# Altium PCB mainboard.PcbDoc
Units mil, origin at the board's own origin, x right, y up, seen from the top; angles counter-clockwise.
Board outline 4859.69 x 2585.03 mil, 2 copper layers (Top Layer, Bottom Layer); 46 components, 46 nets, 202 pads, 50 vias.
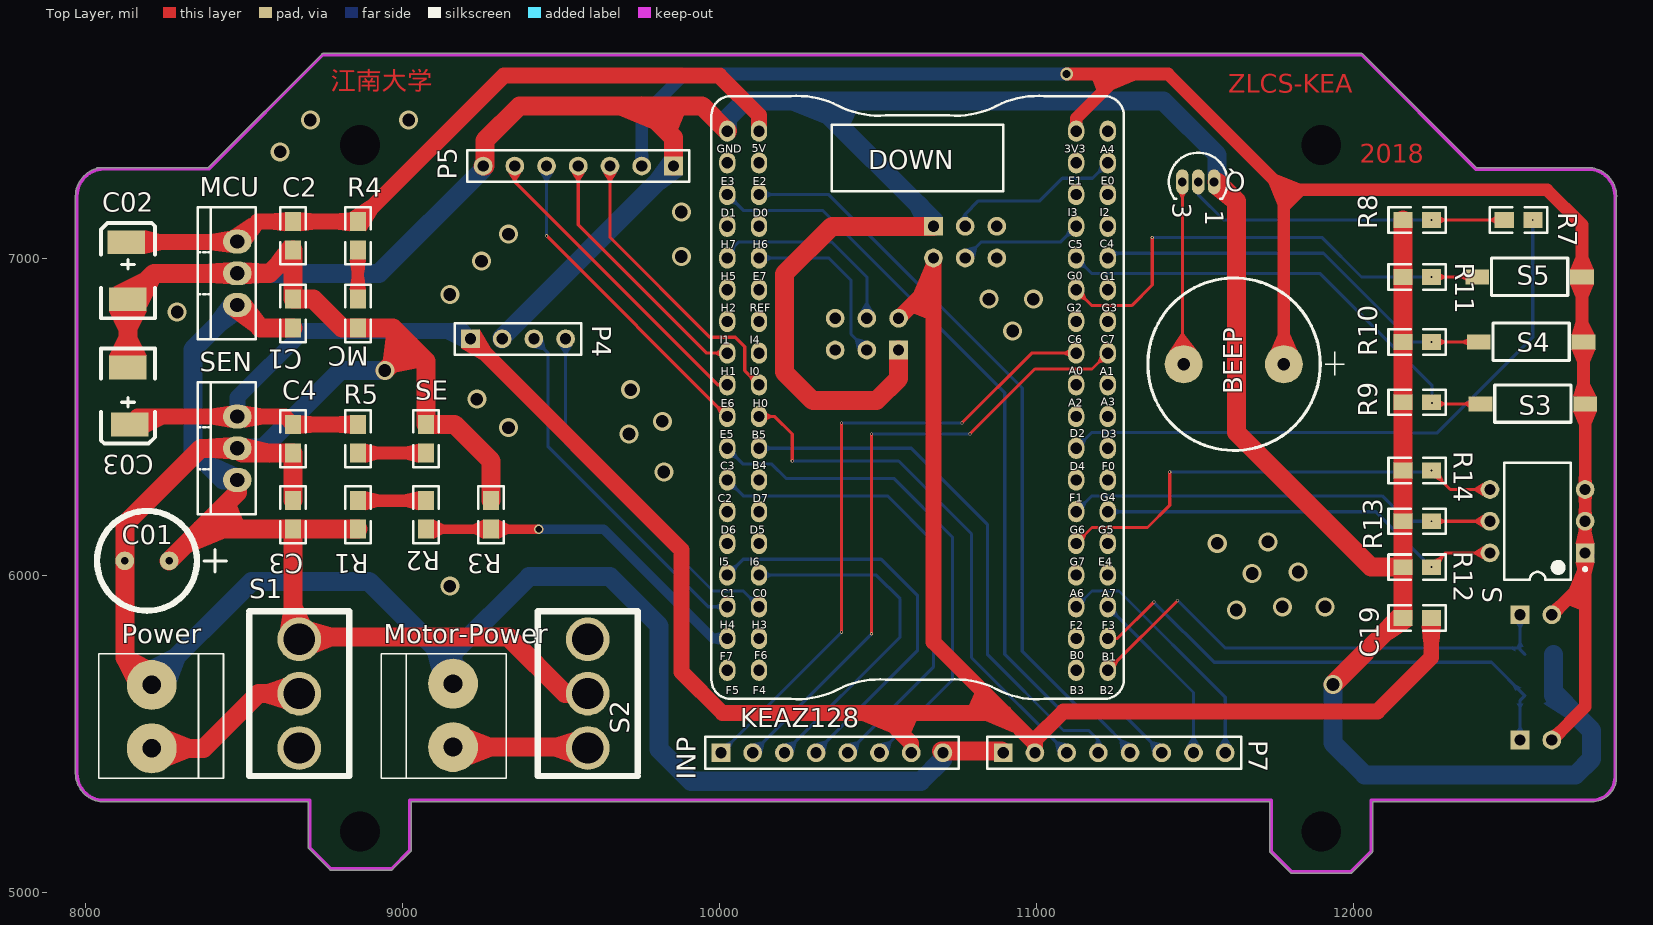
[diagram p0: Top Layer view]
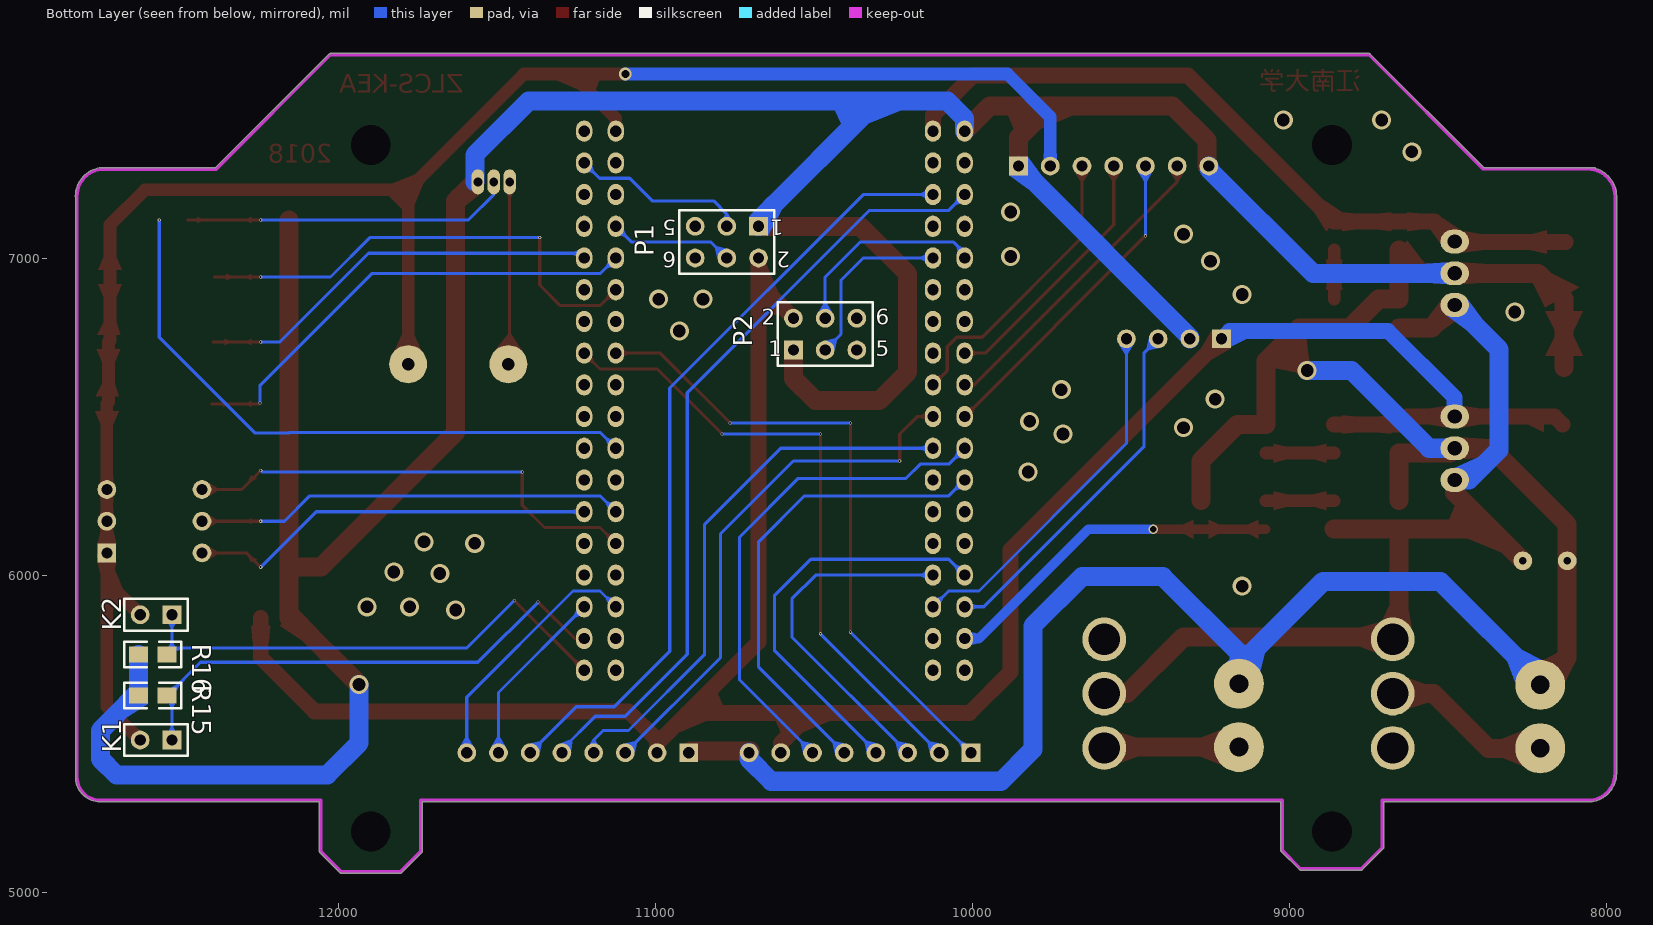
[diagram p1: Bottom Layer view, seen from below]

## Layer stack, top to bottom
Top Solder: solder mask 0.4, Solder Resist, Dk 3.5
Top Layer: signal copper 1.4
Dielectric 1: dielectric 12.6, FR-4, Dk 4.8
Bottom Layer: signal copper 1.4
Bottom Solder: solder mask 0.4, Solder Resist, Dk 3.5

## Board outline
8705.01,5137.46 cw(c8708.54,5141.02) 8703.53,5141.02 8703.53,5284.84 8050,5284.84 cw(c8050,5289.85) 8047.21,5285.69 cw(c8059.57,5375) 7969.4,5375 7969.4,7195 cw(c8059.57,7195) 8035.28,7281.83 cw(c8040,7280.15) 8040,7285.16 8388.07,7285.16 8746.45,7643.55 8746.44,7643.53 cw(c8750,7640) 8750,7645.02 12025,7645.02 cw(c12025,7640) 12028.56,7643.53 12028.55,7643.55 12387.08,7285.02 12737.73,7285.02 cw(c12738.94,7280.15) 12738.94,7285.16 cw(c12738.94,7195) 12744.08,7285.02 12750,7285.02 cw(c12750,7280) 12752.93,7284.07 cw(c12738.94,7195) 12829.1,7195 cw(c12824.08,7195) 12828.95,7193.8 12828.95,5358.4 cw(c12823.94,5358.4) 12828.67,5356.74 cw(c12750.53,5363.4) 12751.76,5284.99 cw(c12750.53,5289.85) 12750.53,5284.84 12060.01,5284.84 12060.01,5129 cw(c12055,5129) 12058.53,5125.43 12058.55,5125.45 11994.55,5061.45 11994.57,5061.47 cw(c11991,5065) 11991,5059.98 11804.57,5059.98 cw(c11804.57,5065) 11801,5061.47 11801.02,5061.45 11736.49,5125.98 11736.51,5125.97 cw(c11740.04,5129.53) 11735.02,5129.53 11735.02,5284.98 9028.52,5284.98 9028.52,5132.5 cw(c9023.5,5132.5) 9027.03,5128.94 9027.05,5128.95 8969.55,5071.45 8969.57,5071.47 cw(c8966,5075) 8966,5069.98 8774.57,5069.98 cw(c8774.57,5075) 8771,5071.47 8771.02,5071.45

## Design rules (kind name [scope] priority, off if disabled: settings)
Clearance [All] p1: gap=10 ignorepadtopadclearanceinfootprint=FALSE except(0: Arc-Hole Track-Hole SMDPad-Hole THPad-Hole Via-Hole Fill-Hole Poly-Hole Region-Hole Text-Hole)
PolygonConnect PolygonConnect_1 [All] p1: connectstyle=Direct reliefconductorwidth=10 reliefentries=4 polygonreliefangle="90 Angle" airgapwidth=10
PolygonConnect [IsVia] p2: connectstyle=Relief reliefconductorwidth=10 reliefentries=4 polygonreliefangle="90 Angle" airgapwidth=10
RoutingVias [All] p1: holewidth=28 width=50 viastyle="Through Hole" minholewidth=28 minwidth=50 maxholewidth=28 maxwidth=50
SolderMaskExpansion [All] p1: expansion=4
Width Width_15 [InNet('NetR1_1')] p1: maxlimit=100 minlimit=10 preferedwidth=40
Width Width_14 [InNet('NetR5_1')] p2: maxlimit=100 minlimit=10 preferedwidth=40
Width Width_13 [InNet('NetQ_2')] p3: maxlimit=100 minlimit=10 preferedwidth=10
Width Width_12 [InNet('NetMC_1')] p4: maxlimit=100 minlimit=10 preferedwidth=40
Width Width_11 [InNet('NetM_55')] p5: maxlimit=100 minlimit=10 preferedwidth=10
Width Width_10 [InNet('NetM_54')] p6: maxlimit=100 minlimit=10 preferedwidth=10
Width Width_9 [InNet('NetD_1')] p7: maxlimit=100 minlimit=10 preferedwidth=40
Width Width_8 [InNet('NetMotor-Power_1')] p8: maxlimit=100 minlimit=10 preferedwidth=60
Width Width_7 [InNet('NetPower_2')] p9: maxlimit=100 minlimit=10 preferedwidth=60
Width Width_6 [InNet('ADC_BAT')] p10: maxlimit=100 minlimit=10 preferedwidth=30
Width Width_5 [InNet('GND')] p11: maxlimit=100 minlimit=10 preferedwidth=60
Width Width_4 [InNet('VCC-3.3V')] p12: maxlimit=100 minlimit=10 preferedwidth=40
Width Width_3 [InNet('5V-MCU')] p13: maxlimit=100 minlimit=10 preferedwidth=50
Width Width_2 [InNet('5V-SEN')] p14: maxlimit=50 minlimit=10 preferedwidth=50
Width Width_1 [InNet('VCC-7.2V')] p15: maxlimit=100 minlimit=10 preferedwidth=60
Width [All] p16: maxlimit=10 minlimit=10 preferedwidth=10
30 further rules are at their usual default settings.

## Classes and differential pairs
component class 主板2: BEEP C01 C1 C2 C02 C03 C3 C4 C19 INP K1 K2 MC MCU Motor-Power P2 P4 P5 Power R1 R2 R3 R4 R5 R7 R8 R9 R10 R11 R12 R13 R14 R15 R16 S S1 S2 S3 S4 S5 SE SEN

## Components (designator, comment, footprint, x,y, rotation, side; value= is the part's Value field where it differs from the comment)
BEEP "" PCBComponent_1 10734,4185 r270 top
C01 "Cap Pol1" "470uf 16V" 8195,6045 r0 top value=1000uF
C1 "Cap" 0805 8655,6870 r270 top value=0.47uF
C2 "Cap" 0805 8655,7025 r90 top value=0.1uF
C02 "Cap Pol1" 7343 8135,6960 r90 top value=22uF
C3 "Cap" 0805 8655,6235 r270 top value=0.47uF
C03 "Cap Pol2" 7343 8135,6565 r270 top value=22uf
C4 "Cap" 0805 8655,6385 r90 top value=0.1uF
C19 "Cap" 0805 12245,5865 r180 top value=0.1uF
INP "" HDR1X8 10005,5440 r0 top
K1 "KEA 1" HDR1X2 12525,5480 r0 bottom
K2 "KEA 2" HDR1X2 12525,5875 r0 bottom
KEAZ128 "S9KEAZ128AMLK" KEA128_CORE 9970,5605 r0 top
MC "LED1" 0805 8860,6870 r270 top
MCU "LM2940S-5.0" TO-220 8480,6951.73 r90 top
Motor-Power "电机接口" P_Header 9160,5557.66 r90 top
P1 "Header 2X3" HDR2X3 10675,7100 r0 bottom
P2 "Header 2X3" HDR2X3 10565,6710 r180 bottom
P4 "MPU_6050" HDR1X4 9215,6745 r0 top
P5 "OLED" HDR1X7 9855,7290 r180 top
P7 "Header 8" HDR1X8 10895,5440 r0 top
Power "电池接口" P_Header 8210,5553.88 r270 top
Q "S8050" TO-92 11510,7240 r270 top
R1 "Res2" 0805 8860,6235 r270 top value=10K
R2 "Res2" 0805 9075,6145 r90 top value=10K
R3 "Res2" 0805 9280,6235 r270 top value=10K
R4 "" 0805 8860,7025 r90 top value=1K
R5 "" 0805 8860,6385 r90 top value=1K
R7 "Res2" 0805 12475,7120 r0 top value=1K
R8 "Res2" 0805 12155,7120 r0 top value=10K
R9 "Res2" 0805 12155,6545 r0 top value=1K
R10 "Res2" 0805 12155,6735 r0 top value=1K
R11 "Res2" 0805 12155,6940 r0 top value=1K
R12 "Res2" 0805 12155,6025 r0 top
R13 "Res2" 0805 12155,6170 r0 top
R14 "Res2" 0805 12155,6330 r0 top
R15 "Res2" 0805 12629.94,5620 r180 bottom value=1K
R16 "Res2" 0805 12629.94,5750 r180 bottom value=1K
S "SW DIP-3" DIP-6 12580,6170 r180 top
S1 "SW-SPDT" Key_SWITCH 8675,5625 r90 top
S2 "SW-SPDT" Key_SWITCH 9585,5627.52 r270 top
S3 "SW-PB" 轻触开关 12520,6560 r90 top
S4 "SW-PB" 轻触开关 12515,6755 r90 top
S5 "SW-PB" 轻触开关 12510,6960 r90 top
SE "LED2" 0805 9075,6385 r90 top
SEN "LM2940S-5.0" TO-220 8480,6400 r90 top

## Footprints (in the part's own frame and the unit in brackets; to place one, negate y for a bottom-side part, rotate by r counter-clockwise, add the part's x,y. Pads: shape width x height; smd on the part's side, far side on the other; paste and mask are expansions set on the pad)
"470uf 16V" [mm]
  round 1.5 hole 0.6: 1(1.778,0) 2(-1.778,0)
  silkscreen extent -4,-4 6.35,4
0805 [mil]
  rect 60x50 smd: 1(0,0) 2(90,0)
  silkscreen extent -45,-40 135,40
7343 [mil]
  rect 75x118.11 smd: 1(90,5) 2(-90,0)
  silkscreen extent -150,-85 150,85
DIP-6 [mm] "DIP; 6 Leads; Row Spacing 7.62 mm; Pitch 2.54 mm"
  rect 1.5x1.5 hole 0.9: 1(-3.81,2.54)
  round 1.5 hole 0.9: 2(-3.81,0) 3(-3.81,-2.54) 4(3.81,-2.54) 5(3.81,0) 6(3.81,2.54)
  silkscreen extent -3.94,-4.7 2.65,4.7, body extent -3.55,-4.7 3.55,4.7, height 5.46
HDR1X2 [mm] "Connector; Header; 2 Position"
  rect 1.5x1.5 hole 0.9: 1(0,0)
  round 1.5 hole 0.9: 2(2.54,0)
  silkscreen extent -1.27,-1.27 3.81,1.27
HDR1X4 [mm] "Connector; Header; 4 Position"
  rect 1.5x1.5 hole 0.9: 1(0,0)
  round 1.5 hole 0.9: 2(2.54,0) 3(5.08,0) 4(7.62,0)
  silkscreen extent -1.27,-1.27 8.89,1.27
HDR1X7 [mm] "Connector; Header; 7 Position"
  rect 1.5x1.5 hole 0.9: 1(0,0)
  round 1.5 hole 0.9: 2(2.54,0) 3(5.08,0) 4(7.62,0) 5(10.16,0) 6(12.7,0) 7(15.24,0)
  silkscreen extent -1.27,-1.27 16.51,1.27
HDR1X8 [mm] "Connector; Header; 8 Position"
  rect 1.5x1.5 hole 0.9: 1(0,0)
  round 1.5 hole 0.9: 2(2.54,0) 3(5.08,0) 4(7.62,0) 5(10.16,0) 6(12.7,0) 7(15.24,0) 8(17.78,0)
  silkscreen extent -1.27,-1.27 19.05,1.27
HDR2X3 [mm] "Connector; Header; 3x2 Position"
  rect 1.5x1.5 hole 0.9: 1(0,0)
  round 1.5 hole 0.9: 2(0,2.54) 3(2.54,0) 4(2.54,2.54) 5(5.08,0) 6(5.08,2.54)
  silkscreen extent -1.27,-1.27 6.35,3.81
KEA128_CORE [mm]
  oval 1.3x1.7 hole 0.9: 1(3.937,45.593) 2(1.397,45.593) 3(3.937,43.053) 4(1.397,43.053) 5(3.937,40.513) 6(1.397,40.513) 7(3.937,37.973) 8(1.397,37.973) 9(3.937,35.433) 10(1.397,35.433) 11(3.937,32.893) 12(1.397,32.893) 13(3.937,30.353) 14(1.397,30.353) 15(3.937,27.813) 16(1.397,27.813) 17(3.937,25.273) 18(1.396,25.277) 19(3.937,22.733) 20(1.397,22.733) 21(3.937,20.193) 22(1.397,20.193) 23(3.937,17.653) 24(1.397,17.653) 25(3.937,15.113) 26(1.397,15.113) 27(3.937,12.573) 28(1.397,12.573) 29(3.937,10.033) 30(1.397,10.033) 31(3.937,7.493) 32(1.397,7.493) 33(3.937,4.953) 34(1.397,4.953) 35(3.937,2.413) 36(1.397,2.413) 37(31.877,45.593) 38(29.337,45.593) 39(31.877,43.053) 40(29.337,43.053) 41(31.877,40.513) 42(29.337,40.513) 43(31.877,37.973) 44(29.337,37.973) 45(31.877,35.433) 46(29.337,35.433) 47(31.877,32.893) 48(29.337,32.893) 49(31.877,30.353) 50(29.337,30.353) 51(31.877,27.813) 52(29.337,27.813) 53(31.877,25.273) 54(29.337,25.273) 55(31.877,22.733) 56(29.337,22.733) 57(31.877,20.193) 58(29.337,20.193) 59(31.877,17.653) 60(29.337,17.653) 61(31.877,15.113) 62(29.337,15.113) 63(31.877,12.573) 64(29.337,12.573) 65(31.877,10.033) 66(29.337,10.033) 67(31.877,7.493) 68(29.337,7.493) 69(31.877,4.953) 70(29.337,4.953) 71(31.877,2.413) 72(29.337,2.413)
  silkscreen extent 0.13,0.1 33.15,48.41
Key_SWITCH [mm]
  round 3.5 hole 2.5: 1(-4.318,0) 2(0.032,0) 3(4.382,0)
  silkscreen extent -6.57,-4 6.63,4
P_Header [mm]
  round 4 hole 1.5: 1(-2.54,0) 2(2.54,0)
  silkscreen extent -5.05,-4.25 4.95,5.75
PCBComponent_1 [mil]
  round 120 hole 40: 1(-2480,1046) 2(-2480,730)
  silkscreen extent -2752,617 -2208,1236
TO-92 [mm] "TO, Flat Index; 3 In-Line, Axial Leads; Body Dia. 4.6mm; Leads 0.41 x 0.39 mm (max)"
  oval 2x1 hole 0.7: 1(0,1.27) 2(0,0) 3(0,-1.27)
  silkscreen extent -2.34,-2.34 1.35,2.34
TO-220 [mil]
  oval 75x90 hole 45: 1(-100,0) 2(0,0) 3(100,0)
  silkscreen extent -208,-58 208,125
轻触开关 [mil]
  rect 47.24x74.8 smd: 1(-20,-210) 2(-20,120)
  silkscreen extent -78,-165 40,75

## Part data
BEEP: library part BEEP
C01 C02: "Polarized Capacitor (Radial)", LatestRevisionDate=17-Jul-2002, LatestRevisionNote="Re-released for DXP Platform.", PackageDescription="Polarized Capacitor (Radial); 2 Leads", PackageReference=RB7.6-15, Published=8-Jun-2000, Publisher="Altium Limited"
C1 C2 C3 C4 C19: "Capacitor", LatestRevisionDate=17-Jul-2002, LatestRevisionNote="Re-released for DXP Platform.", PackageDescription="Radial Cap, Thru-Hole; 2 Leads; 0.3 in Pin Spacing", PackageReference=RAD-0.3, Published=8-Jun-2000, Publisher="Altium Limited"
C03: "Polarized Capacitor (Axial)", LatestRevisionDate=17-Jul-2002, LatestRevisionNote="Re-released for DXP Platform.", PackageReference=POLAR0.8, Published=8-Jun-2000, Publisher="Altium Limited"
INP: library part "Header 8", "接插件", LatestRevisionDate=17-Jul-2002, LatestRevisionNote="Re-released for DXP Platform.", Publisher="Altium Limited"
K2: library part "KEA 1"
KEAZ128: library part KEA128-Core
MC SE: library part LED0, "Typical INFRARED GaAs LED", LatestRevisionDate=08-Jul-2005, LatestRevisionNote="Mech Layer 1 removed.", PackageDescription="LED; 2 Leads", PackageReference=LED-0, Published=8-Jun-2000, Publisher="Altium Limited"
MCU SEN: library part LM2940
Motor-Power Power: library part "Header 2", "Header, 2-Pin", LatestRevisionDate=17-Jul-2002, LatestRevisionNote="Re-released for DXP Platform.", Publisher="Altium Limited"
P1 P2: library part 编码器
P4: library part "Header 4", "Header, 4-Pin", LatestRevisionDate=17-Jul-2002, LatestRevisionNote="Re-released for DXP Platform.", Publisher="Altium Limited"
P5: library part "Header 7", "Header, 7-Pin", LatestRevisionDate=17-Jul-2002, LatestRevisionNote="Re-released for DXP Platform.", Publisher="Altium Limited"
P7: "Header, 8-Pin", LatestRevisionDate=17-Jul-2002, LatestRevisionNote="Re-released for DXP Platform.", Publisher="Altium Limited"
Q: library part NPN, "8050/BCW846/BCW847"
R1 R2 R3 R7 R8 R9 R10 R11 R12 R13 R14 R15 R16: "Resistor", LatestRevisionDate=17-Jul-2002, LatestRevisionNote="Re-released for DXP Platform.", PackageReference=AXIAL-0.4, Published=8-Jun-2000
  R1 R2 R3 R7 R8 R9 R10 R11 R15 R16: Publisher="Altium Limited"
  R12 R13 R14: Publisher=1K
R4 R5: library part Res2, "Resistor", LatestRevisionDate=17-Jul-2002, LatestRevisionNote="Re-released for DXP Platform.", PackageDescription="Axial Device, Thru-Hole; 2 Leads; 0.4 in Pin Spacing", PackageReference=AXIAL-0.4, Published=8-Jun-2000, Publisher="Altium Limited"
S: "DIP Switch, 3 Position, SPST", Code_JEDEC=MO-001-AM, LatestRevisionDate=17-Jul-2002, LatestRevisionNote="Re-released for DXP Platform.", PackageReference=DIP-6, Published=24-Mar-1999, Publisher="Altium Limited"
S1 S2: "SPDT Subminiature Toggle Switch, Right Angle Mounting, Vertical Actuation", ComponentLink1Description="Manufacturer Link", ComponentLink1URL=http://www.apem.com, DatasheetDocument=05-Dec-2000, LatestRevisionDate=17-Dec-2003, LatestRevisionNote="Schematic revised, PCB Footprint replaced.", PackageReference=TL36WW15050, Published=24-Mar-1999, Publisher="Altium Limited"
S3 S4 S5: "Switch", LatestRevisionDate=17-Jul-2002, LatestRevisionNote="Re-released for DXP Platform.", PackageReference=SPST-2, Published=24-Mar-1999, Publisher="Altium Limited"

## Free pads (board coordinates)
  round 60 hole 125.98: 0(8866.46,5191.57) 1(8866.46,7356.93) 2(11897.95,7356.93) 3(11897.95,5191.57)

## Via types
v1: diameter 60, hole 40, Top Layer to Bottom Layer, 28 vias
v2: diameter 10, hole 6, Top Layer to Bottom Layer, 20 vias
v3: diameter 30, hole 20, Top Layer to Bottom Layer, 1 vias
v4: diameter 40, hole 25, Top Layer to Bottom Layer, 1 vias

## Nets (pads, with @x,y where several pads share a name; then routed paths per layer and width w, separated by ;. In a path a pad name is that pad's centre, name@x,y a point inside that pad or via, vN(x,y) a via of type N, cw(c..) or ccw(c..) an arc to the next point about the centre after c; other vN are vias at no path point)
5V-MCU: C02.1 C2.2 KEAZ128.1 MCU.3 R4.2 | length 2314.2
  Top Layer w50: C02.1 8478.27,7050 MCU.3 8543.27,7115 C2.2 R4.2 9320,7575 10000,7575 10125,7450 KEAZ128.1
5V-SEN: C03.1 C4.2 C19.1 INP.7 P1.2 P2.2 P4.1 P7.2 R5.2 SEN.3 | length 7537.5
  Top Layer w50: C03.1 8165,6500 SEN.3 8630,6500 C4.2 R5.2 ; P4.1 9880,6080 9880,5695 10010,5565 10510,5565 ; P2.2 10675,6920 ; INP.7 10605,5470 10510,5565 ; P1.2 10675,6920 ; P7.2 P7.2@10995,5469.06 ; C19.1 12245,5740 12075,5570 11085,5570 10995,5480 P7.2@10995,5469.06 ; 10510,5565 10899.06,5565 ; 10675,6920 10675,5789.06 10899.06,5565 ; 10899.06,5565 P7.2@10995,5469.06
  Bottom Layer w50: SEN.3 8480,6560 8690,6770 9190,6770 P4.1
ADC_BAT: KEAZ128.34 R2.1 R3.2 | length 1092.9
  Top Layer w30: R2.1 R3.2 v3(9430,6145)
  Bottom Layer w30: v3(9430,6145) 9635,6145 9980,5800 KEAZ128.34
BEEP: KEAZ128.58 R7.2 | length 1956.2
  Bottom Layer w10: KEAZ128.58 11175,6450 12153.28,6450 12154.82,6448.46 12263.46,6448.46 12565,6750 v2(12565,7120)
D0: KEAZ128.17 P5.3 | length 931.5
  Top Layer w10: P5.3 9655,7065 9970,6750 10050,6750 10080,6720 10080,6645 KEAZ128.17
D1: KEAZ128.16 P5.4 | length 822.8
  Top Layer w10: P5.4 9555,7105 9960,6700 KEAZ128.16
DC: KEAZ128.18 P5.6 | length 985
  Top Layer w10: P5.6 9355,7240 9994.86,6600.14 KEAZ128.18
Dir_L: KEAZ128.44 P1.4 | length 391.4
  Bottom Layer w10: P1.4 10825,7050 11075,7050 KEAZ128.44
Dir_R: KEAZ128.10 P2.4 | length 645.1
  Bottom Layer w10: KEAZ128.10 10025,7015 10060,7050 10355,7050 10465,6940 P2.4
EN_motorL: KEAZ128.68 P7.8 | length 804.5
  Bottom Layer w10: KEAZ128.68 11175,5950 11260,5950 11595,5615 P7.8
EN_motorR: KEAZ128.67 P7.7 | length 571.8
  Bottom Layer w10: KEAZ128.67 11495,5630 P7.7
GHG1: K1.1 KEAZ128.69 R15.2 | length 1631
  Top Layer w10: KEAZ128.69 11255,5800 v2(11370,5915)
  Bottom Layer w10: v2(11370,5915) 11560,5725 12434.94,5725 R15.2 12525,5605.06 K1.1
GHG2: K2.1 KEAZ128.71 R16.2 | length 1586.5
  Top Layer w10: KEAZ128.71 v2(11445,5920)
  Bottom Layer w10: v2(11445,5920) 11595,5770 12519.94,5770 R16.2@12525,5764.94 ; K2.1 R16.2@12525,5764.94 ; R16.2 R16.2@12525,5764.94
GND: C1.1 C01.2 C2.1 C02.2 C3.1 C03.2 C4.1 C19.2 INP.8 KEAZ128.2 MC.2 MCU.2 Motor-Power.2 P1.1 P2.1 P4.2 P5.1 P5.7 P7.1 Power.1 Q.1 R3.1 R8.1 R9.1 R10.1 R11.1 R12.1 R13.1 R14.1 R15.1 R16.1 SE.2 SEN.2 | length 18771.6
  Top Layer w60: C03.2 C02.2 8216.73,6951.73 MCU.2 8581.73,6951.73 C2.1 C1.1 8720,6870 8810,6780 MC.2 8970,6780 9025,6725 ; Power.1 8125,5738.88 C01.2 8125,6160 8365,6400 SEN.2 8495,6385 C4.1 C3.1 ; v1(8945,6645) 9025,6725 ; Motor-Power.2@9155,5662.66 Motor-Power.2 ; P5.7 9260.47,7290 9260.47,7370.47 9370,7480 9755,7480 ; R3.1 9280,6360 9165,6475 SE.2 9075,6675 9025,6725 ; P5.1 9855,7380 9755,7480 ; KEAZ128.2 9945,7480 9755,7480 ; P2.1 10565,6620 10495,6550 10295,6550 10205,6640 10205,6950 10355,7100 P1.1 ; INP.8@10700,5445 P7.1@10890,5445 ; Q.1@11569.68,7240 11630,7179.69 11630,6450 12055,6025 R12.1 ; v1(11935,5655) 12145,5865 C19.2 R12.1 ; R8.1 R11.1 R10.1 R9.1 R14.1 R13.1 R12.1
  Bottom Layer w60: Power.1 8210,5665 8525,5980 8895,5980 Motor-Power.2@9160,5715 ; SEN.2 8560,6400 8805,6645 v1(8945,6645) ; MCU.2 8926.73,6951.73 9255,7280 P5.7 ; Motor-Power.2 Motor-Power.2@9160,5715 ; P4.2 9315,6750 P5.1 ; KEAZ128.2 10025,7440 10080,7495 10300,7495 ; P1.1 10675,7120 10300,7495 ; INP.8 10705,5420 10635,5350 9910,5350 9810,5450 9810,5840 9655,5995 9400,5995 9160,5755 Motor-Power.2@9160,5715 ; Q.1@11569.68,7240 11569.68,7325.31 11400,7495 10300,7495 ; v1(11935,5655) 11935,5470 12035,5370 12700,5370 12750,5420 12750,5510 12640,5620 R15.1 R16.1
KEY_1: KEAZ128.46 R9.2 S3.2 | length 1497.8
  Top Layer w10: v2(12247.5,6542.5) 12250,6540 S3.2
  Bottom Layer w10: KEAZ128.46 11173.46,6951.54 11893.46,6951.54 12247.5,6597.5 v2(12247.5,6542.5)
KEY_2: KEAZ128.45 R10.2 S4.2 | length 1292.2
  Top Layer w10: v2(12245,6735) S4.2
  Bottom Layer w10: KEAZ128.45 11240,7015 11905,7015 12185,6735 v2(12245,6735)
KEY_3: KEAZ128.48 R11.2 S5.2 | length 1514.4
  Top Layer w10: KEAZ128.48 11175,6850 11300,6850 11365,6915 v2(11365,7065) ; v2(12245,6940) S5.2
  Bottom Layer w10: v2(11365,7065) 11900,7065 12025,6940 v2(12245,6940)
LSB_L: KEAZ128.39 P1.3 | length 555.3
  Bottom Layer w10: P1.3 10775,7138.28 10816.72,7180 11010,7180 11081.54,7251.54 11176.54,7251.54 KEAZ128.39
LSB_R: KEAZ128.9 P2.3 | length 559.7
  Bottom Layer w10: KEAZ128.9 10345,7000 10415,6930 10415,6760 P2.3
NetBEEP_2: BEEP.2 Q.3 | length 576.7
  Top Layer w10: Q.3 11460,6669 BEEP.2
NetMC_1: MC.1 R4.1 | length 155
  Top Layer w40: MC.1 R4.1
NetMotor-Power_1: Motor-Power.1 S2.3 | length 433.2
  Top Layer w60: Motor-Power.1@9166.42,5455 cw(c9166.42,5464.07) Motor-Power.1 9582.34,5457.66 S2.3
NetPower_2: Power.2 S1.2 | length 536.4
  Top Layer w60: Power.2 8373.88,5453.88 8546.26,5626.26 S1.2
NetQ_2: Q.2 R7.1 R8.2 | length 1038.1
  Top Layer w10: v2(12245,7120) R7.1
  Bottom Layer w10: Q.2 11510,7200 11590,7120 v2(12245,7120)
NetR1_1: R1.1 R2.2 | length 215
  Top Layer w40: R1.1 R2.2
NetR5_1: R5.1 SE.1 | length 215
  Top Layer w40: R5.1 SE.1
OUT1: INP.1 KEAZ128.52 | length 2028.5
  Top Layer w10: v2(10385,5820) v2(10385,6480) ; v2(10765,6480) 10985,6700 KEAZ128.52
  Bottom Layer w10: INP.1 v2(10385,5820) ; v2(10385,6480) v2(10765,6480)
OUT2: INP.2 KEAZ128.51 | length 2011
  Top Layer w10: v2(10480,5815) v2(10480,6445) ; v2(10790,6445) 10995,6650 11175,6650 KEAZ128.51
  Bottom Layer w10: INP.2 v2(10480,5815) ; v2(10480,6445) v2(10790,6445)
OUT3: INP.3 KEAZ128.29 | length 1112.3
  Bottom Layer w10: KEAZ128.29 10495,6000 10570,5925 10570,5805 INP.3
OUT4: INP.4 KEAZ128.30 | length 1295.9
  Bottom Layer w10: KEAZ128.30 10075,6050 10510,6050 10625,5935 10625,5763.28 10305,5443.28 INP.4
OUT5: INP.5 KEAZ128.24 | length 1507.6
  Bottom Layer w10: KEAZ128.24 10075,6250 10530,6250 10675,6105 10675,5710 INP.5
OUT6: INP.6 KEAZ128.22 | length 1601.2
  Bottom Layer w10: KEAZ128.22 10075,6350 10165,6350 10210,6305 10550,6305 10735,6120 10735,5670 INP.6
PWM1: KEAZ128.5 P7.6 | length 2485.2
  Bottom Layer w10: KEAZ128.5 10345,7200 10955,6590 10955,5760 11130,5585 11250,5585 P7.6
PWM2: KEAZ128.6 P7.5 | length 2488.1
  Bottom Layer w10: KEAZ128.6 10075,7150 10325,7150 10900,6575 10900,5750 11095,5555 11190,5555 11295,5450 P7.5
PWM3: KEAZ128.21 P7.4 | length 1731.2
  Bottom Layer w10: KEAZ128.21 10605,6400 10845,6160 10845,5750 11085,5510 11165,5510 11195,5480 P7.4
PWM4: KEAZ128.19 P7.3 | length 1687.3
  Top Layer w10: KEAZ128.19 10175,6500 10230,6445 v2(10230,6360)
  Bottom Layer w10: v2(10230,6360) 10565,6360 10795,6130 10795,5740 P7.3
reed_switchL: KEAZ128.3
reed_switchR: KEAZ128.4
RES: KEAZ128.20 P5.5 | length 1036.1
  Top Layer w10: v2(9455,7070) KEAZ128.20 ; P5.5@9455,7280 P5.5
  Bottom Layer w10: v2(9455,7070) P5.5
SCL: KEAZ128.32 P4.3 | length 1132.8
  Bottom Layer w10: P4.3 9460,6700 9460,6405 9965,5900 KEAZ128.32
SDA: KEAZ128.31 P4.4 | length 1153.3
  Bottom Layer w10: P4.4 9515,6415 9980,5950 10075,5950 KEAZ128.31
SW_1: KEAZ128.61 R12.2 S.6 | length 1296.1
  Top Layer w10: v2(12245,6025) 12290,6070 S.6
  Bottom Layer w10: KEAZ128.61 12070,6200 v2(12245,6025)
SW_2: KEAZ128.62 R13.2 S.5 | length 1358.8
  Top Layer w10: v2(12245,6170) S.5
  Bottom Layer w10: KEAZ128.62 11175,6250 12090,6250 12170,6170 v2(12245,6170)
SW_3: KEAZ128.64 R14.2 S.4 | length 1486.6
  Top Layer w10: KEAZ128.64 11175,6150 11350,6150 11420,6220 v2(11420,6325) ; v2(12245,6330) 12305,6270 S.4
  Bottom Layer w10: v2(11420,6325) 12240,6325 v2(12245,6330)
VCC-3.3V: BEEP.1 K1.2 K2.2 KEAZ128.38 P5.2 S3.1 S4.1 S5.1 S.1 S.2 S.3 | length 5995.9
  Top Layer w40: v4(11095,7580) 11265,7580 ; KEAZ128.38 11125,7440 11265,7580 ; BEEP.1 11780,7215 ; K1.2 12730,5585 12730,5980 ; K2.2 12730,5980 ; 11265,7580 11415,7580 11780,7215 ; 11780,7215 12610,7215 12720,7105 S5.1 12720,6740 S4.1 12725,6545 S3.1 S.3 S.2 S.1 12730,5980
  Bottom Layer w40: P5.2 9755,7445 9890,7580 v4(11095,7580) ; S.1 S.1@12740,6060
VCC-7.2V: C01.1 C1.2 C3.2 MCU.1 R1.2 S1.3 S2.2 SEN.1 | length 3080.7
  Top Layer w60: C01.1 8365,6145 ; SEN.1 8480,6260 8365,6145 ; MCU.1 8551.73,6780 C1.2 ; R1.2 C3.2 ; S2.2 9513.74,5626.26 9335,5805 8682.48,5805 S1.3 8655,5817.52 C3.2 ; 8365,6145 C3.2
  Bottom Layer w60: SEN.1 8435,6300 8340,6395 8340,6711.73 MCU.1
pads on no net: KEAZ128.7 KEAZ128.8 KEAZ128.11 KEAZ128.12 KEAZ128.13 KEAZ128.14 KEAZ128.15 KEAZ128.23 KEAZ128.25 KEAZ128.26 KEAZ128.27 KEAZ128.28 KEAZ128.33 KEAZ128.35 KEAZ128.36 KEAZ128.37 KEAZ128.40 KEAZ128.41 KEAZ128.42 KEAZ128.43 KEAZ128.47 KEAZ128.49 KEAZ128.50 KEAZ128.53 KEAZ128.54 KEAZ128.55 KEAZ128.56 KEAZ128.57 KEAZ128.59 KEAZ128.60 KEAZ128.63 KEAZ128.65 KEAZ128.66 KEAZ128.70 KEAZ128.72 P1.5 P1.6 P2.5 P2.6 S1.1 S2.1
copper on no net:
  other v1: 11630,5890 11775,5900 11910,5900 9150,5965 11680,6005 11825,6010 11570,6100 11730,6105 9825,6325 9715,6445 9335,6465 9820,6485 9235,6555 9720,6585 10925,6770 8290,6830 10850,6870 10990,6870 9150,6885 9250,6990 9880,7005 9335,7075 9880,7145 8615,7335 8710,7435 9020,7435

## Keep-outs
Keep-Out Layer:
  lines w10: 8040,7280.15 8390.15,7280.15 8750,7640 9099.57,7640 12025,7640 12385,7280 12750,7280 ; 8050,5289.85 8708.54,5289.85 8708.54,5141.02 8774.57,5075 8966,5075 9023.5,5132.5 9023.5,5290 11740.04,5290 11740.04,5129.53 11804.57,5065 11991,5065 12055,5129 12055,5290 ; 8059.57,5289.85 cw(c8059.57,5375) 7974.42,5375 7974.42,7195 cw(c8059.57,7195) 8059.57,7280.15 ; 12055.15,5289.85 12750.53,5289.85 ; 12738.94,7280.15 cw(c12738.94,7195) 12824.08,7195 ; 12750.53,5290 ccw(c12750.53,5363.4) 12823.94,5363.4 ; 12823.94,5358.4 12823.94,7195

## Other copper
Top Layer:
  text "江南大学" at 8775,7510 h100
  text "ZLCS-KEA" at 11605,7500 h100
  text "2018" at 12020,7280 h100

## Text inside footprints (layer, text, board x,y; h text height)
KEAZ128: Top Overlay "3V3" at 11086.81,7331.99 h25; Top Overlay "B2" at 11200,5625 h25; Top Overlay "F5" at 10020,5625 h25; Top Overlay "F4" at 10105,5625 h25; Top Overlay "B3" at 11105,5625 h25; Top Overlay "5V" at 10101.79,7332.81 h25; Top Overlay "E4" at 11195,6030 h25; Top Overlay "G7" at 11105,6030 h25; Top Overlay "A7" at 11205,5930 h25; Top Overlay "A6" at 11105,5930 h25; Top Overlay "F3" at 11205,5830 h25; Top Overlay "F2" at 11105,5830 h25; Top Overlay "B1" at 11205,5730 h25; Top Overlay "B0" at 11105,5735 h25; Top Overlay "F7" at 10000.76,5731.43 h25; Top Overlay "F6" at 10110,5735 h25; Top Overlay "H4" at 10001.13,5830.77 h25; Top Overlay "H3" at 10101.5,5830.77 h25; Top Overlay "C1" at 10005,5930 h25; Top Overlay "C0" at 10105,5930 h25; Top Overlay "I5" at 10000.3,6029.84 h25; Top Overlay "I6" at 10096.49,6029.84 h25; Top Overlay "D5" at 10095,6130 h25; Top Overlay "D6" at 10005,6130 h25; Top Overlay "H5" at 10005,6930 h25; Top Overlay "H6" at 10105,7030 h25; Top Overlay "REF" at 10095,6830 h25; Top Overlay "H2" at 10005,6830 h25; Top Overlay "I1" at 10001.38,6729.38 h25; Top Overlay "I4" at 10095,6730 h25; Top Overlay "I0" at 10095,6630 h25; Top Overlay "H1" at 10005,6630 h25; Top Overlay "E6" at 10005,6530 h25; Top Overlay "H0" at 10105,6530 h25; Top Overlay "B5" at 10101.26,6429.32 h25; Top Overlay "E5" at 10001.24,6431.51 h25; Top Overlay "B4" at 10103.98,6333.12 h25; Top Overlay "C3" at 10003.4,6332.57 h25; Top Overlay "D7" at 10105,6230 h25; Top Overlay "C2" at 9995,6230 h25; Top Overlay "C5" at 11100.42,7030.67 h25; Top Overlay "C4" at 11199.7,7033 h25; Top Overlay "A4" at 11200.25,7331.08 h25; Top Overlay "E7" at 10105,6930 h25; Top Overlay "GND" at 9991.38,7331.72 h25; Top Overlay "I2" at 11199.35,7132.32 h25; Top Overlay "I3" at 11098.6,7131.41 h25; Top Overlay "E1" at 11100.42,7231.24 h25; Top Overlay "E0" at 11202.07,7231.24 h25; Top Overlay "E3" at 10005,7230 h25; Top Overlay "E2" at 10105,7230 h25; Top Overlay "D0" at 10105,7130 h25; Top Overlay "D1" at 10005,7130 h25; Top Overlay "H7" at 10005,7030 h25; Top Overlay "G5" at 11195,6130 h25; Top Overlay "G6" at 11105,6130 h25; Top Overlay "G0" at 11097.7,6930.83 h25; Top Overlay "G1" at 11201.02,6929.54 h25; Top Overlay "G3" at 11205,6830 h25; Top Overlay "G2" at 11095,6830 h25; Top Overlay "C6" at 11099.21,6730.74 h25; Top Overlay "C7" at 11202.51,6731.86 h25; Top Overlay "A1" at 11199.72,6630.79 h25; Top Overlay "A0" at 11101.45,6632.47 h25; Top Overlay "A2" at 11099.77,6531.4 h25; Top Overlay "A3" at 11202.51,6534.75 h25; Top Overlay "D3" at 11204.02,6433.11 h25; Top Overlay "D2" at 11104.06,6434.46 h25; Top Overlay "D4" at 11105,6330 h25; Top Overlay "F0" at 11205,6330 h25; Top Overlay "G4" at 11201.32,6232.51 h25; Top Overlay "F1" at 11103.12,6231.54 h25; Top Overlay "DOWN" at 10470,7280 h60
P1: Bottom Overlay "6" at 10935,7020 h50 r180; Bottom Overlay "5" at 10935,7120 h50 r180; Bottom Overlay "2" at 10575,7020 h50 r180; Bottom Overlay "1" at 10595,7120 h50 r180
P2: Bottom Overlay "6" at 10305,6790 h50; Bottom Overlay "5" at 10305,6690 h50; Bottom Overlay "2" at 10665,6790 h50; Bottom Overlay "1" at 10645,6690 h50
Q: Top Overlay "1" at 11532.05,7152.44 h59.05 r270; Top Overlay "3" at 11430,7175 h59.05 r270